# EAGLE board mobilityPlane (EAGLE 6.1)
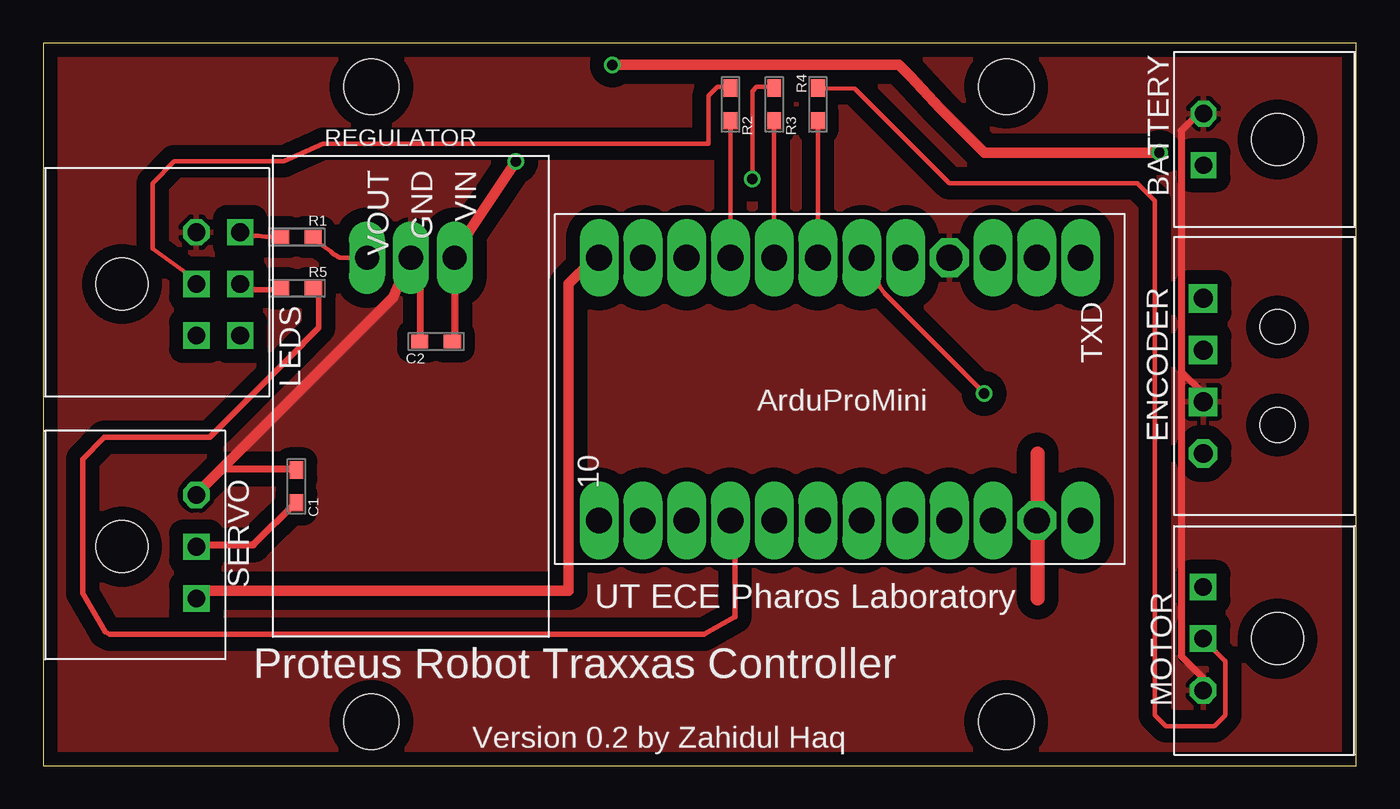
[diagram p0: board, top side]
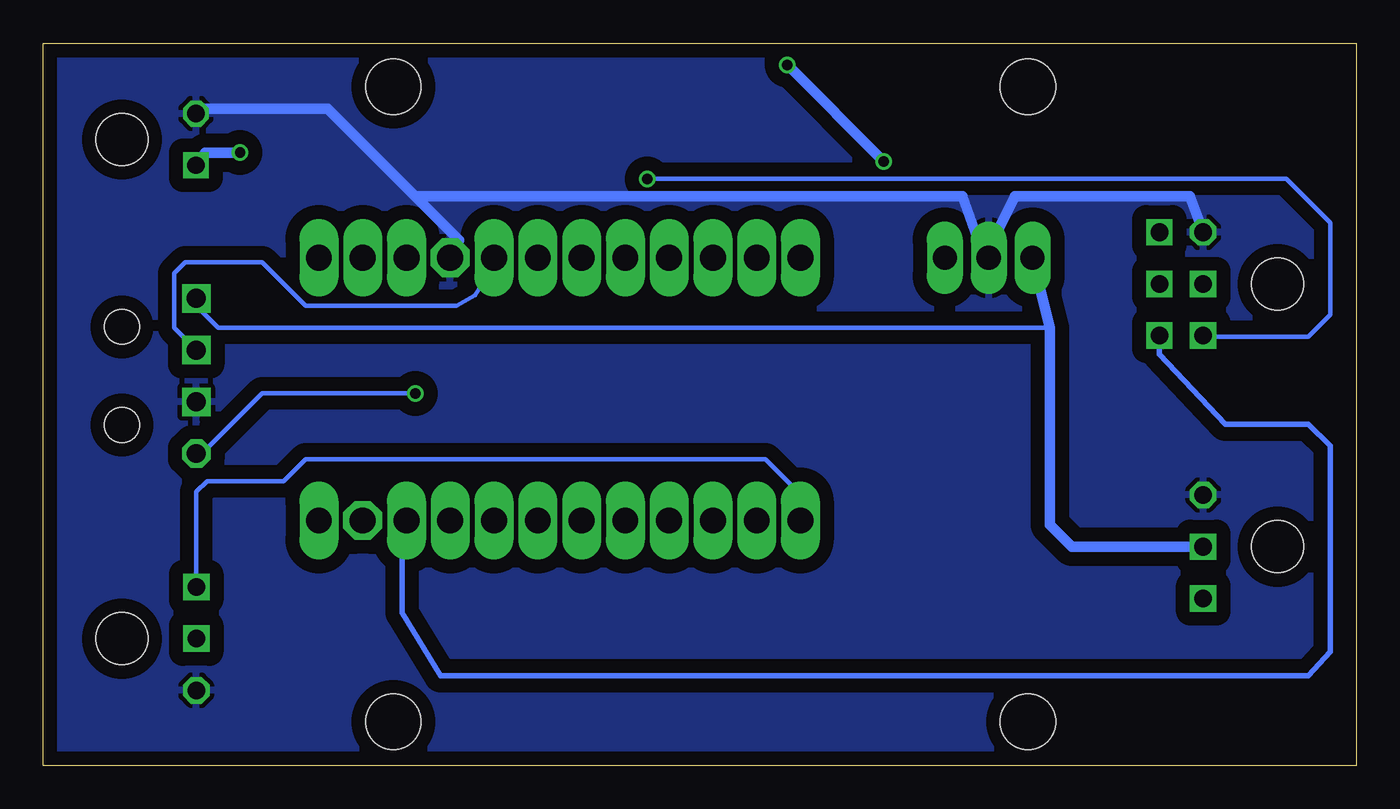
[diagram p1: board, bottom side, seen from below]

Size 76.2 x 41.91 mm. Coordinates in mm from the lower left corner, seen from the top.
Outline: 0,0 76.2,0 76.2,41.91 0,41.91 0,0
Copper layers (1*16): Top 0.0356mm / dielectric 1.5011mm / Bottom 0.0356mm
Design rules: minimum track width 6mil, minimum drill 13mil, track to track 6mil, track to pad 6mil, pad to pad 6mil, via to via 6mil, smd to smd 6mil, copper to edge 15mil, drill to drill 6mil, minimum pad ring 7mil, minimum via ring 7mil, stop-mask expansion 4mil, vias tented up to drill 0mil, thermal gap 10mil
Holes 3.2 mm at 19.05,39.37 19.05,2.54 55.88,39.37 55.88,2.54

## Footprints (pad centres in the part's own frame; a part is rotated, then mirrored left to right if it is on the bottom)
ARDUMINI = drill 1.5 pad 1.93 long: 2 -7.62,3.81; 3 -7.62,1.27; 4 -7.62,-1.27; 5 -7.62,-3.81; 6 -7.62,-6.35; 7 -7.62,-8.89; 8 -7.62,-11.43; 9 -7.62,-13.97; 10 7.62,-13.97; 11 7.62,-11.43; 12 7.62,-8.89; 13 7.62,-6.35; A0 7.62,-3.81; A1 7.62,-1.27; A2 7.62,1.27; A3 7.62,3.81; RAW 7.62,13.97; RST -7.62,8.89; RST2 7.62,8.89; RXI -7.62,11.43; TXD -7.62,13.97; VCC 7.62,6.35 | drill 1.5 pad 2.184 octagon: GND -7.62,6.35; GND2 7.62,11.43
LED = drill 1 square: + -1.5,4.3 | drill 1 octagon: - 1.5,4.3 | hole 3: 0,0
SMDRESISTOR = smd 1 x 0.8: (+) -0.95,0; (-) 0.95,0
LOCK4PIN = drill 1.1 octagon: (-) -4.5,4.32 | drill 1.1 square: P$2 -1.5,4.32; P$3 1.5,4.32; P$4 4.5,4.32 | hole 2: 2.85,0; -2.85,0
LOCK6PIN = drill 1.02 octagon: (-) -3,4.32 | drill 1.02 square: P$0 -3,6.86; P$1 0,6.86; P$2 0,4.32; P$3 3,4.32; P$4 3,6.86 | hole 3: 0,0
LOCK3PIN = drill 1.02 octagon: (-) -3,4.32 | drill 1.02 square: P$2 0,4.32; P$3 3,4.32 | hole 3: 0,0
REGULATOR = drill 1.4 long: GND 0,0; VIN 0,2.54; VOUT 0,-2.54

## Placement (x,y rotation side)
ARDUINOMINIPRO  ARDUMINI  [ARDUMINI]  46.23,21.84 270 top
BATTERY  BATTERY  [LED]  71.63,36.32 90 top
C1  [SMDRESISTOR]  14.7,16.2 90 top
C2  [SMDRESISTOR]  22.8,24.6 0 top
ENCODER  ENCODER  [LOCK4PIN]  71.63,22.61 90 top
LEDS  LED4PIN  [LOCK6PIN]  4.57,27.94 270 top
MOTOR  SERIAL  [LOCK3PIN]  71.63,7.37 90 top
R1  SMDRESISTOR  [SMDRESISTOR]  14.72,30.66 180 top
R2  SMDRESISTOR  [SMDRESISTOR]  39.88,38.35 90 top
R3  SMDRESISTOR  [SMDRESISTOR]  42.42,38.35 90 top
R4  SMDRESISTOR  [SMDRESISTOR]  44.96,38.35 270 top
R5  SMDRESISTOR  [SMDRESISTOR]  14.73,27.69 180 top
REGULATOR  REGULATOR  [REGULATOR]  21.34,29.46 270 top
SERVO  SERVO  [LOCK3PIN]  4.57,12.7 270 top

## Library data of the parts
ARDUINOMINIPRO BATTERY C1 C2 ENCODER LEDS MOTOR R1-R5 REGULATOR SERVO = ardupromini

## Nets
GND: ARDUINOMINIPRO.GND BATTERY.- ENCODER.P$2 LEDS.(-) MOTOR.(-) REGULATOR.GND SERVO.(-)
N$3: R1.(-)
N$4: ARDUINOMINIPRO.9 SERVO.P$3
N$5: ARDUINOMINIPRO.10 MOTOR.P$3
N$6: ARDUINOMINIPRO.2 ENCODER.P$3
N$7: ARDUINOMINIPRO.3 ENCODER.(-)
N$8: ENCODER.P$4 REGULATOR.VOUT SERVO.P$2
N$9: ARDUINOMINIPRO.5 R3.(+)
N$10: R3.(-)
N$11: MOTOR.P$2 R4.(+)
N$12: ARDUINOMINIPRO.6 R2.(+)
N$13: R2.(-)
N$15: ARDUINOMINIPRO.4 R4.(-)
PWR: BATTERY.+ REGULATOR.VIN
S$2: ARDUINOMINIPRO.RST2

## Tracks (layer width: path | path; a pad name or v marks a point on that pad's centre or on a via)
GND
  Top 0.254: SERVO.(-) 8.89,15.75 | BATTERY.- 67.31,38.1 | 67.31,21.59 ENCODER.P$2
  Top 0.406: 67.31,38.1 66.04,36.83 66.04,22.86 | 66.04,22.86 67.31,21.59 | 66.04,22.86 66.04,6.35 67.31,5.08 MOTOR.(-)
  Top 0.61: 8.89,15.75 20.32,27.18 REGULATOR.GND
  Bottom 0.254: 67.31,38.1 BATTERY.- | REGULATOR.GND 21.59,29.46
  Bottom 0.61: LEDS.(-) 9.65,33.02 19.81,33.02 21.59,29.46 22.86,33.02 54.61,33.02 | 54.61,33.02 59.69,38.1 67.31,38.1 | 54.61,33.02 52.07,30.48 ARDUINOMINIPRO.GND
  pour Top (isolate 0.813): 0.6,41.1 9.65,41.1 75.6,41.45 75.8,0.9 0.35,0.3 0.6,37.65
  pour Bottom (isolate 0.813): 0.4,41.4 0.4,41.5 75.8,41.5 75.8,0.4 0.5,0.4 0.5,41.4
N$3
  Top 0.254: R1.(-) 12.89,30.66 12.5,30.73 11.41,30.73
N$4
  Top 0.61: SERVO.P$3 8.89,10.16 30.48,10.16 30.48,27.94 31.75,29.21 ARDUINOMINIPRO.9
N$5
  Bottom 0.254: MOTOR.P$3 67.31,10.16 67.31,15.88 66.67,16.51 62.23,16.51 60.96,17.78 34.29,17.78 31.75,15.24 ARDUINOMINIPRO.10
N$6
  Bottom 0.254: ARDUINOMINIPRO.2 50.3,28.64 51.13,27.28 52.21,26.67 60.96,26.67 63.5,29.21 67.94,29.21 68.58,28.57 68.58,25.4 67.31,24.13 ENCODER.P$3
N$7  (via drill 0.61)
  Top 0.254: ARDUINOMINIPRO.3 47.55,29.45 48.17,28.59 48.32,28.33 48.53,27.8 48.81,27.39 v54.61,21.59
  Bottom 0.254: v54.61,21.59 63.5,21.59 67.31,17.78 ENCODER.(-)
N$8
  Top 0.254: REGULATOR.VOUT 17.31,29.46 17.25,29.47 16.85,29.67 16.68,29.83 15.54,30.64
  Bottom 0.254: SERVO.P$2 | 17.78,25.4 66.04,25.4 67.31,26.67 ENCODER.P$4
  Bottom 0.61: SERVO.P$2 16.51,12.7 17.78,13.97 17.78,25.4 REGULATOR.VOUT
N$9
  Top 0.254: R3.(+) ARDUINOMINIPRO.5
N$10  (via drill 0.6)
  Top 0.254: R3.(-) 42.56,39.25 42.67,39.37 41.4,39.37 41.15,39.12 v41.15,34.04
  Bottom 0.254: v41.15,34.04 4.06,34.04 1.52,31.5 1.52,26.16 2.79,24.89 9.14,24.89
N$11
  Top 0.254: R4.(+) 47.11,39.25 52.58,33.78 63.5,33.78 64.52,32.77 64.52,2.92 65.15,2.29 67.94,2.29 68.58,2.92 68.58,6.1 MOTOR.P$2
N$12
  Top 0.254: R2.(+) ARDUINOMINIPRO.6
N$13
  Top 0.254: R2.(-) 39.88,39.37 39.12,39.37 38.61,38.86 38.61,36.07 16.26,36.07 13.97,35.05 7.62,35.05 6.35,33.78 6.35,29.97 9.17,27.94
N$15
  Top 0.254: R4.(-) ARDUINOMINIPRO.4
PWR  (via drill 0.6)
  Top 0.254: REGULATOR.VIN 23.88,29.72
  Top 0.61: 23.88,29.72 v27.43,35.05 | v33.02,40.64 49.66,40.64 50.29,40.01 52.07,38.1 54.61,35.56 v64.77,35.56
  Bottom 0.61: v27.43,35.05 v33.02,40.64 | v64.77,35.56 66.8,35.56 BATTERY.+
S$1
  Top 0.406: 14.8,17.2 10.3,17.2 8.8,15.7
S$2
  Bottom 0.305: ARDUINOMINIPRO.RST2 55.37,14.22 55.37,8.88 53.14,5.23 2.79,5.23 1.52,6.6 1.52,18.54 2.79,19.81 7.62,19.81 11.43,23.88 11.43,24.89
S$3
  Bottom 0.305: 11.68,27.69 11.43,27.69 11.68,27.94
S$4
  Top 0.305: 40.13,13.97 40.13,8.64 38.35,7.62 3.88,7.62 3.62,7.76 2.29,9.99 2.29,17.78 3.56,19.05 9.65,19.05 14.21,23.61 15.99,25.41
S$5
  Top 0.406: 8.9,12.8 12.2,12.8 14.8,15.4
S$6
  Top 0.305: 16,25.4 16,27.7
S$7
  Top 0.305: 13.7,27.6 11.5,27.6 11.4,27.7 | 11.4,27.7 11.4,27.8 11.5,27.8 11.4,27.7 | 11.4,27.7 11.6,27.7
S$8
  Top 0.406: 21.9,24.5 21.9,28.1 21.6,28.4
S$9
  Top 0.406: 23.9,24.5 23.9,28.8 23.8,28.9
S$10
  Top 0.813: 57.7,18.1 57.7,9.7

## Text on the board
tNames: UT ECE Pharos Laboratory | Proteus Robot Traxxas Controller | Version 0.2 by Zahidul Haq